# Altium PCB MGMEZZ04.PcbDoc (part 7 of 9)
Units mil, origin at the board's own origin, x right, y up, seen from the top; angles counter-clockwise.
Board outline 3790 x 5472.44 mil, 10 copper layers (TopLayer, InternalPlane1, MidLayer1, InternalPlane2, MidLayer2, MidLayer3, InternalPlane3, MidLayer4, InternalPlane4, BottomLayer), stack 57.08 mil thick; 846 components, 745 nets, 3323 pads, 1906 vias.
Unrouted connection lines stored in the file: 128.
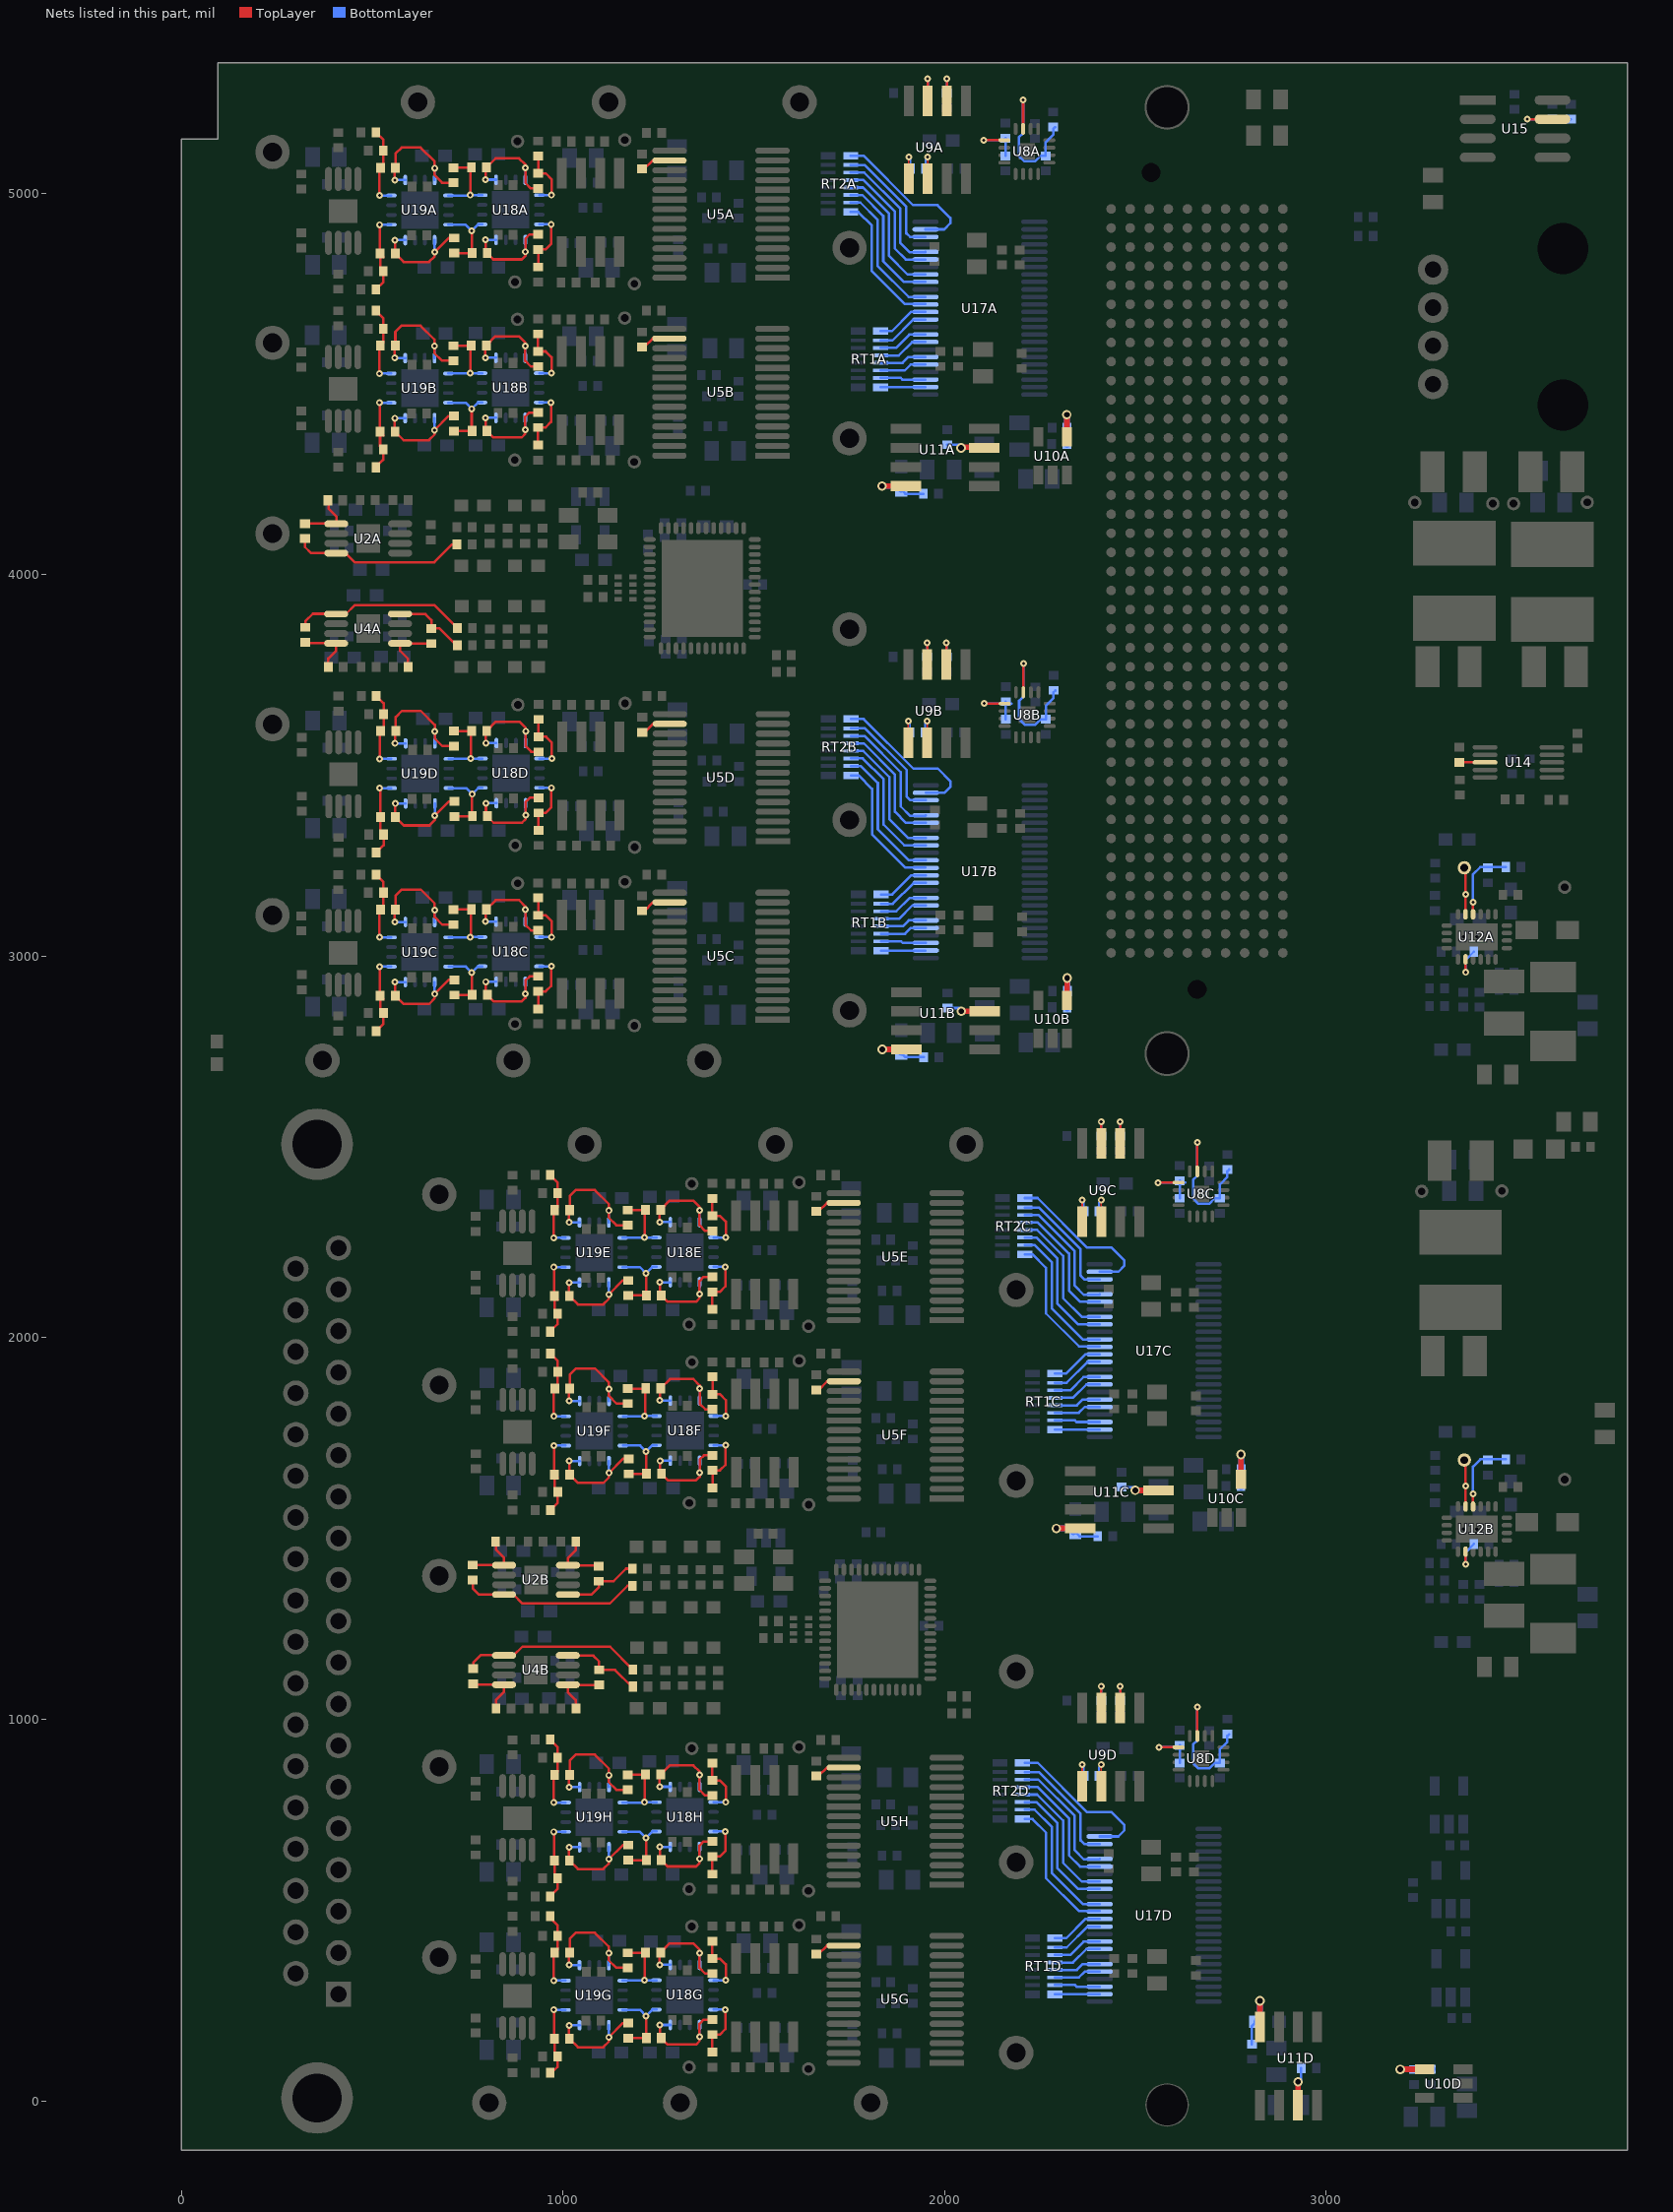
[diagram p15: the nets of this part, all layers, seen from the top]

## Via types
v1: diameter 18, hole 8, TopLayer to BottomLayer, 1296 vias
v2: diameter 18, hole 8, TopLayer to BottomLayer, tented both sides, 203 vias
v3: diameter 19.68, hole 7.87, TopLayer to BottomLayer, 188 vias
v4: diameter 25, hole 15, TopLayer to BottomLayer, tented both sides, 99 vias
v5: diameter 25, hole 15, TopLayer to BottomLayer, 72 vias
v6: diameter 35, hole 20, TopLayer to BottomLayer, 48 vias

## Nets (pads, with @x,y where several pads share a name; then routed paths per layer and width w, separated by ;. In a path a pad name is that pad's centre, name@x,y a point inside that pad or via, vN(x,y) a via of type N, cw(c..) or ccw(c..) an arc to the next point about the centre after c; other vN are vias at no path point) (continued)
NetR1B_1: R1B.1 R3B.2 U2B.8 | length 151.4
  TopLayer w6.5: U2B.8@1013.18,1403.29 R1B.1@1093.8,1403.29 ; U2B.8@1013.18,1403.85 1013.18,1422.78 1033.8,1443.4 R3B.2@1033.8,1466.12
NetR1B_2: R1B.2 R2B.1 U2B.5 | length 215.3
  TopLayer w6.5: U2B.5@1013.18,1326.51 1074.28,1326.51 1093.8,1346.03 R1B.2@1093.8,1362.03 ; R1B.2@1102.43,1362.03 R1B.2@1093.8,1362.03 ; R2B.1@1182.2,1394.84 1165.23,1394.84 1132.43,1362.03 R1B.2@1093.8,1362.03
NetR6A_2: R6A.2 R8A.1 U2A.1 | length 152.9
  TopLayer w6.5: R8A.1@324.11,4134.05 406.17,4134.05 406.17,4152.99 385.54,4173.61 R6A.2@385.54,4196.33
NetR6B_2: R6B.2 R8B.1 U2B.1 | length 152.9
  TopLayer w6.5: R8B.1@763.8,1404.4 845.86,1404.4 845.86,1423.34 825.23,1443.96 R6B.2@825.23,1466.68
NetR7A_1: R7A.1 R8A.2 U2A.4 | length 455.9
  TopLayer w6.5: R8A.2@324.11,4094.68 324.11,4072.49 339.32,4057.28 U2A.4@406.17,4057.28 ; U2A.4@406.17,4056.72 430.44,4056.72 454.11,4033.05 663.11,4033.05 709.54,4079.49 R7A.1@722.51,4079.49
NetR7B_1: R7B.1 R8B.2 U2B.4 | length 475.9
  TopLayer w6.5: R8B.2@763.8,1365.03 763.8,1342.84 779.01,1327.63 U2B.4@845.86,1327.63 ; U2B.4@845.86,1327.07 870.13,1327.07 893.8,1303.4 1092.8,1303.4 1122.8,1303.4 1169.23,1349.84 R7B.1@1182.2,1349.84
NetR9A_1: R9A.1 R11A.2 U4A.8 | length 151.4
  TopLayer w6.5: R9A.1@325.17,3820.94 U4A.8@405.79,3820.94 ; R11A.2@385.17,3758.1 385.17,3780.82 405.79,3801.44 U4A.8@405.79,3820.38
NetR9A_2: R9A.2 R10A.1 U4A.5 | length 456.6
  TopLayer w6.5: R9A.2@325.17,3862.19 325.17,3878.19 344.69,3897.71 U4A.5@405.79,3897.71 ; U4A.5@405.79,3897.15 431.21,3897.15 454.11,3920.05 663.94,3920.05 R10A.1@723.51,3860.49
NetR9B_1: R9B.1 R11B.2 U4B.8 | length 151.4
  TopLayer w6.5: R9B.1@764.86,1091.29 U4B.8@845.48,1091.29 ; R11B.2@824.86,1028.46 824.86,1051.17 845.48,1071.79 U4B.8@845.48,1090.73
NetR9B_2: R9B.2 R10B.1 U4B.5 | length 476.6
  TopLayer w6.5: R9B.2@764.86,1132.54 764.86,1148.54 784.38,1168.06 U4B.5@845.48,1168.06 ; U4B.5@845.48,1167.5 870.9,1167.5 893.8,1190.4 1093.63,1190.4 1123.63,1190.4 R10B.1@1183.2,1130.84
NetR14A_2: R14A.2 R16A.1 U4A.1 | length 152.9
  TopLayer w6.5: R14A.2@593.73,3757.54 593.73,3780.26 573.11,3800.88 573.11,3819.82 R16A.1@655.17,3819.82
NetR14B_2: R14B.2 R16B.1 U4B.1 | length 152.9
  TopLayer w6.5: R14B.2@1033.42,1027.9 1033.42,1050.61 1012.8,1071.24 1012.8,1090.17 R16B.1@1094.86,1090.17
NetR15A_1: R15A.1 R16A.2 U4A.4 | length 221.3
  TopLayer w6.5: U4A.4@548.84,3897.15 U4A.4@573.11,3897.15 ; U4A.4@573.11,3896.59 639.96,3896.59 655.17,3881.39 R16A.2@655.17,3859.19 676.6,3859.19 720.31,3815.49 R15A.1@723.51,3815.49
NetR15B_1: R15B.1 R16B.2 U4B.4 | length 241.3
  TopLayer w6.5: U4B.4@988.53,1167.5 U4B.4@1012.8,1167.5 ; U4B.4@1012.8,1166.94 1079.65,1166.94 1094.86,1151.74 R16B.2@1094.86,1129.54 1106.29,1129.54 1136.29,1129.54 1180,1085.84 R15B.1@1183.2,1085.84
NetR18A_1: R18A.1 R23A.1 R104A.2 U19A.8 | length 209.1
  TopLayer w6.5: R18A.1@510,5159 529.37,5139.63 R23A.1@529.37,5111.45 529.37,5074.65 519,5064.28 v1@519,4998.48 ; v1@518,4998.48 v1@522.24,4994.24
  BottomLayer w6.5: v1(519.24,4994.24) U19A.8@549.5,4994.24
NetR18B_1: R18B.1 R23B.1 R104B.2 U19B.8 | length 209.1
  TopLayer w6.5: R18B.1@509.75,4692.34 529.12,4672.97 R23B.1@529.12,4644.79 529.12,4607.99 518.75,4597.62 v1@518.75,4531.82 ; v1@517.75,4531.82 v1@522,4527.58
  BottomLayer w6.5: v1(519,4527.58) U19B.8@549.26,4527.58
NetR18C_1: R18C.1 R23C.1 R104C.2 U19C.8 | length 209.1
  TopLayer w6.5: R18C.1@510.2,3214.37 529.57,3195 R23C.1@529.57,3166.82 529.57,3130.02 519.2,3119.65 v1@519.2,3053.85 ; v1@518.2,3053.85 v1@522.44,3049.61
  BottomLayer w6.5: v1(519.44,3049.61) U19C.8@549.7,3049.61
NetR18D_1: R18D.1 R23D.1 R104D.2 U19D.8 | length 209.1
  TopLayer w6.5: R18D.1@510.81,3682.34 530.18,3662.97 R23D.1@530.18,3634.79 530.18,3597.99 519.81,3587.62 v1@519.81,3521.82 ; v1@518.81,3521.82 v1@523.06,3517.58
  BottomLayer w6.5: v1(520.06,3517.58) U19D.8@550.32,3517.58
NetR18E_1: R18E.1 R23E.1 R104E.2 U19E.8 | length 209.1
  TopLayer w6.5: R18E.1@966.5,2426.69 985.87,2407.32 R23E.1@985.87,2379.14 985.87,2342.34 975.5,2331.97 v1@975.5,2266.17 ; v1@974.5,2266.17 v1@978.75,2261.93
  BottomLayer w6.5: v1(975.75,2261.93) U19E.8@1006.01,2261.93
NetR18F_1: R18F.1 R23F.1 R104F.2 U19F.8 | length 209.1
  TopLayer w6.5: R18F.1@966.89,1958.98 986.26,1939.61 R23F.1@986.26,1911.43 986.26,1874.63 975.89,1864.26 v1@975.89,1798.46 ; v1@974.89,1798.46 v1@979.13,1794.22
  BottomLayer w6.5: v1(976.13,1794.22) U19F.8@1006.39,1794.22
NetR18G_1: R18G.1 R23G.1 R104G.2 U19G.8 | length 209.1
  TopLayer w6.5: R18G.1@966.5,479.98 985.87,460.61 R23G.1@985.87,432.43 985.87,395.63 975.5,385.26 v1@975.5,319.46 ; v1@974.5,319.46 v1@978.75,315.22
  BottomLayer w6.5: v1(975.75,315.22) U19G.8@1006.01,315.22
NetR18H_1: R18H.1 R23H.1 R104H.2 U19H.8 | length 209.1
  TopLayer w6.5: R18H.1@966.5,946.69 985.87,927.32 R23H.1@985.87,899.14 985.87,862.34 975.5,851.97 v1@975.5,786.17 ; v1@974.5,786.17 v1@978.75,781.93
  BottomLayer w6.5: v1(975.75,781.93) U19H.8@1006.01,781.93
NetR20A_2: R20A.2 U5A.16 | length 81.2
  TopLayer w6.5: R20A.2@1207.11,5063.65 1213.11,5063.65 1235.31,5085.85 U5A.16@1279.11,5085.85
NetR20B_2: R20B.2 U5B.16 | length 81.2
  TopLayer w6.5: R20B.2@1206.86,4596.99 1212.86,4596.99 1235.06,4619.19 U5B.16@1278.86,4619.19
NetR20C_2: R20C.2 U5C.16 | length 81.2
  TopLayer w6.5: R20C.2@1207.31,3119.02 1213.31,3119.02 1235.51,3141.22 U5C.16@1279.31,3141.22
NetR20D_2: R20D.2 U5D.16 | length 81.2
  TopLayer w6.5: R20D.2@1207.92,3586.99 1213.92,3586.99 1236.12,3609.19 U5D.16@1279.92,3609.19
NetR20E_2: R20E.2 U5E.16 | length 81.2
  TopLayer w6.5: R20E.2@1663.61,2331.34 1669.61,2331.34 1691.81,2353.54 U5E.16@1735.61,2353.54
NetR20F_2: R20F.2 U5F.16 | length 81.2
  TopLayer w6.5: R20F.2@1664,1863.63 1670,1863.63 1692.2,1885.83 U5F.16@1736,1885.83
NetR20G_2: R20G.2 U5G.16 | length 81.2
  TopLayer w6.5: R20G.2@1663.61,384.63 1669.61,384.63 1691.81,406.83 U5G.16@1735.61,406.83
NetR20H_2: R20H.2 U5H.16 | length 81.2
  TopLayer w6.5: R20H.2@1663.61,851.34 1669.61,851.34 1691.81,873.54 U5H.16@1735.61,873.54
NetR21_2: R21.2 R25.1 U15.7 | length 176.9
  TopLayer w6.5: v1@3530.03,5194 U15.7@3593,5194
  BottomLayer w6.5: v1(3527.03,5194) R21.2@3593,5194 R25.1@3641,5194
NetR26A_1: R26A.1 R35A.1 R103A.1 U19A.5 | length 223.8
  TopLayer w6.5: R35A.1@510,4748.3 529.37,4767.67 R26A.1@529.37,4795.85 521.11,4804.11 R103A.1@521.11,4841.65 523.24,4843.78 520.24,4846.78 v1@520.24,4917.47 ; R103A.1@521.74,4840.28 R103A.1@529.37,4832.65
  BottomLayer w6.5: v1(519.24,4917.47) U19A.5@549.5,4917.47
NetR26B_1: R26B.1 R35B.1 R103B.1 U19B.5 | length 223.8
  TopLayer w6.5: R35B.1@509.75,4281.63 529.12,4301 R26B.1@529.12,4329.19 520.86,4337.45 R103B.1@520.86,4374.99 523,4377.12 520,4380.12 v1@520,4450.81 ; R103B.1@521.49,4373.62 R103B.1@529.12,4365.99
  BottomLayer w6.5: v1(519,4450.81) U19B.5@549.26,4450.81
NetR26C_1: R26C.1 R35C.1 R103C.1 U19C.5 | length 223.8
  TopLayer w6.5: R35C.1@510.2,2803.67 529.57,2823.04 R26C.1@529.57,2851.22 521.31,2859.48 R103C.1@521.31,2897.02 523.44,2899.15 520.44,2902.15 v1@520.44,2972.84 ; R103C.1@521.94,2895.65 R103C.1@529.57,2888.02
  BottomLayer w6.5: v1(519.44,2972.84) U19C.5@549.7,2972.84
NetR26D_1: R26D.1 R35D.1 R103D.1 U19D.5 | length 223.8
  TopLayer w6.5: R35D.1@510.81,3271.63 530.18,3291 R26D.1@530.18,3319.19 521.92,3327.45 R103D.1@521.92,3364.99 524.06,3367.12 521.06,3370.12 v1@521.06,3440.81 ; R103D.1@522.55,3363.62 R103D.1@530.18,3355.99
  BottomLayer w6.5: v1(520.06,3440.81) U19D.5@550.32,3440.81
NetR26E_1: R26E.1 R35E.1 R103E.1 U19E.5 | length 223.8
  TopLayer w6.5: R35E.1@966.5,2015.99 985.87,2035.36 R26E.1@985.87,2063.54 977.61,2071.8 R103E.1@977.61,2109.34 979.75,2111.47 976.75,2114.47 v1@976.75,2185.16 ; R103E.1@978.24,2107.97 R103E.1@985.87,2100.34
  BottomLayer w6.5: v1(975.75,2185.16) U19E.5@1006.01,2185.16
NetR26F_1: R26F.1 R35F.1 R103F.1 U19F.5 | length 223.8
  TopLayer w6.5: R35F.1@966.89,1548.28 986.26,1567.65 R26F.1@986.26,1595.83 978,1604.09 R103F.1@978,1641.63 980.13,1643.76 977.13,1646.76 v1@977.13,1717.45 ; R103F.1@978.63,1640.26 R103F.1@986.26,1632.63
  BottomLayer w6.5: v1(976.13,1717.45) U19F.5@1006.39,1717.45
NetR26G_1: R26G.1 R35G.1 R103G.1 U19G.5 | length 223.8
  TopLayer w6.5: R35G.1@966.5,69.28 985.87,88.65 R26G.1@985.87,116.83 977.61,125.09 R103G.1@977.61,162.63 979.75,164.76 976.75,167.76 v1@976.75,238.45 ; R103G.1@978.24,161.26 R103G.1@985.87,153.63
  BottomLayer w6.5: v1(975.75,238.45) U19G.5@1006.01,238.45
NetR26H_1: R26H.1 R35H.1 R103H.1 U19H.5 | length 223.8
  TopLayer w6.5: R35H.1@966.5,535.99 985.87,555.36 R26H.1@985.87,583.54 977.61,591.8 R103H.1@977.61,629.34 979.75,631.47 976.75,634.47 v1@976.75,705.16 ; R103H.1@978.24,627.97 R103H.1@985.87,620.34
  BottomLayer w6.5: v1(975.75,705.16) U19H.5@1006.01,705.16
NetR27A_1: R27A.1 R28A.2 U10A.4 | length 138.5
  TopLayer w15: U10A.4@2320.28,4361.42 v5(2320.28,4419.66)
  BottomLayer w15: v5(2320.28,4419.66) 2321.02,4418.92 R27A.1@2321.02,4385.43 2321.02,4340.63 R28A.2@2320.37,4339.99
NetR27B_1: R27B.1 R28B.2 U10B.4 | length 138.5
  TopLayer w15: U10B.4@2321.09,2884.76 v5(2321.09,2942.99)
  BottomLayer w15: v5(2321.09,2942.99) 2321.83,2942.25 R27B.1@2321.83,2908.77 2321.83,2863.97 R28B.2@2321.18,2863.32
NetR27C_1: R27C.1 R28C.2 U10C.4 | length 145.5
  TopLayer w15: U10C.4@2776.78,1629.11 v5(2776.78,1694.35)
  BottomLayer w15: v5@2776.78,1687.35 2777.52,1686.61 2777.52,1608.32 R28C.2@2776.87,1607.68
NetR27D_1: R27D.1 R28D.2 U10D.4 | length 147.2
  TopLayer w15: v5@3197.16,82.47 U10D.4@3258.39,82.47
  BottomLayer w15: v5@3194.16,83.21 3279.18,83.21 R28D.2@3279.83,82.56
  other v5: 3194.16,82.47
NetR37A_2: R37A.2 R38A.1 U8A.15 | length 374.9
  TopLayer w6.5: U8A.15@2205.8,5168.63 2205.8,5234.5
  BottomLayer w6.5: 2205.8,5234.5 2205.8,5157.43 2194.65,5146.28 2194.65,5097.95 2209.02,5083.58 2236.92,5083.58 2251.29,5097.95 R38A.1@2264.65,5097.95 2264.65,5133.58 2284.65,5153.58 2284.65,5168.58 R37A.2@2289.65,5173.58
  other v1: 2205.8,5244.5
NetR37B_2: R37B.2 R38B.1 U8B.15 | length 374.9
  TopLayer w6.5: U8B.15@2206.61,3691.97 2206.61,3757.84
  BottomLayer w6.5: 2206.61,3757.84 2206.61,3680.77 2195.46,3669.62 2195.46,3621.29 2209.83,3606.92 2237.74,3606.92 2252.11,3621.29 R38B.1@2265.46,3621.29 2265.46,3656.92 2285.46,3676.92 2285.46,3691.92 R37B.2@2290.46,3696.92
  other v1: 2206.61,3767.84
NetR37C_2: R37C.2 R38C.1 U8C.15 | length 374.9
  TopLayer w6.5: U8C.15@2662.3,2436.32 2662.3,2502.2
  BottomLayer w6.5: 2662.3,2502.2 2662.3,2425.12 2651.15,2413.97 2651.15,2365.64 2665.52,2351.27 2693.43,2351.27 2707.8,2365.64 R38C.1@2721.15,2365.64 2721.15,2401.27 2741.15,2421.27 2741.15,2436.27 R37C.2@2746.15,2441.27
  other v1: 2662.3,2512.2
NetR37D_2: R37D.2 R38D.1 U8D.15 | length 374.9
  TopLayer w6.5: U8D.15@2662.3,956.32 2662.3,1022.2
  BottomLayer w6.5: 2662.3,1022.2 2662.3,945.12 2651.15,933.97 2651.15,885.64 2665.52,871.27 2693.43,871.27 2707.8,885.64 R38D.1@2721.15,885.64 2721.15,921.27 2741.15,941.27 2741.15,956.27 R37D.2@2746.15,961.27
  other v1: 2662.3,1032.2
NetR39A_2: R39A.2 R40A.2 U11A.4 | length 180.4
  TopLayer w15: v5@1831,4232.62 U11A.4@1899.38,4232.62
  BottomLayer w6.5: R39A.2@1886,4223 1897,4212 R40A.2@1944.63,4212
  BottomLayer w15: v5(1836.14,4232.62) R39A.2@1871.38,4232.62 ; R39A.2@1876.38,4232.62 R39A.2@1886,4223
NetR39B_2: R39B.2 R40B.2 U11B.4 | length 175.3
  TopLayer w15: v5(1836.96,2755.95) U11B.4@1900.19,2755.95
  BottomLayer w6.5: R39B.2@1886.81,2746.34 1897.81,2735.34 R40B.2@1945.44,2735.34
  BottomLayer w15: v5(1836.96,2755.95) R39B.2@1872.2,2755.95 ; R39B.2@1877.2,2755.95 R39B.2@1886.81,2746.34
NetR39C_2: R39C.2 R40C.2 U11C.4 | length 170.3
  TopLayer w15: v5(2292.65,1500.31) U11C.4@2350.88,1500.31
  BottomLayer w6.5: R39C.2@2342.5,1490.69 2353.5,1479.69 R40C.2@2401.13,1479.69
  BottomLayer w15: v5(2292.65,1500.31) 2327.89,1500.31 R39C.2@2337.5,1490.69
NetR39D_2: R39D.2 R40D.2 U11D.4 | length 190.3
  TopLayer w15: U11D.4@2826.14,193.69 v5(2826.14,261.93)
  BottomLayer w6.5: R40D.2@2805.53,148.44 2805.53,196.07 R39D.2@2816.53,207.07
  BottomLayer w15: R39D.2@2816.53,207.07 2826.14,216.69 v5(2826.14,261.93)
NetR41A_2: R41A.2 R42A.1 U8A.1 | length 160.4
  TopLayer w6.5: v1(2102.71,5139.1) U8A.1@2156.58,5139.1
  BottomLayer w6.5: v1@2102.71,5136.1 2106.61,5140 2155.43,5140 R41A.2@2159.65,5144.21 R42A.1@2159.65,5097.95
NetR41B_2: R41B.2 R42B.1 U8B.1 | length 172.1
  TopLayer w6.5: v1(2103.52,3662.44) U8B.1@2157.4,3662.44
  BottomLayer w6.5: v1(2103.52,3662.44) 2175.46,3662.44 ; R42B.1@2160.46,3621.29 R41B.2@2160.46,3667.55
NetR41C_2: R41C.2 R42C.1 U8C.1 | length 172.1
  TopLayer w6.5: v1(2559.21,2406.79) U8C.1@2613.09,2406.79
  BottomLayer w6.5: v1(2559.21,2406.79) 2631.15,2406.79 ; R42C.1@2616.15,2365.64 R41C.2@2616.15,2411.9
NetR41D_2: R41D.2 R42D.1 U8D.1 | length 151.1
  TopLayer w6.5: v1(2562.21,926.79) U8D.1@2613.09,926.79
  BottomLayer w6.5: v1(2562.21,926.79) R41D.2@2616.15,926.79 ; R42D.1@2616.15,885.64 R41D.2@2616.15,931.9
NetR43A_1: R43A.1 U9A.7 | length 94.1
  TopLayer w6.5: U9A.7@1956.01,5242.6 v1(1956.01,5299.66)
  BottomLayer w6.5: R43A.1@1956.01,5262.6 v1(1956.01,5299.66)
NetR43B_1: R43B.1 U9B.7 | length 94.1
  TopLayer w6.5: U9B.7@1954.71,3764.89 v1(1954.71,3821.95)
  BottomLayer w6.5: R43B.1@1954.71,3784.89 v1(1954.71,3821.95)
NetR43C_1: R43C.1 U9C.7 | length 94.1
  TopLayer w6.5: U9C.7@2410.4,2509.24 v1(2410.4,2566.31)
  BottomLayer w6.5: R43C.1@2410.4,2529.24 v1(2410.4,2566.31)
NetR43D_1: R43D.1 U9D.7 | length 94.1
  TopLayer w6.5: U9D.7@2410.4,1029.24 v1(2410.4,1086.31)
  BottomLayer w6.5: R43D.1@2410.4,1049.24 v1(2410.4,1086.31)
NetR45A_1: R45A.1 U9A.6 | length 95.5
  TopLayer w6.5: U9A.6@2006.01,5242.6 v1(2006,5299.66)
  TopLayer w15: U9A.6@2006.01,5242.6 U9A.6@2007,5243.59
  BottomLayer w6.5: R45A.1@2006,5262.6 v1(2006,5299.66)
NetR45B_1: R45B.1 U9B.6 | length 95.5
  TopLayer w6.5: U9B.6@2004.71,3764.89 v1(2004.7,3821.95)
  TopLayer w15: U9B.6@2004.71,3764.89 U9B.6@2005.7,3765.88
  BottomLayer w6.5: R45B.1@2004.7,3784.89 v1(2004.7,3821.95)
NetR45C_1: R45C.1 U9C.6 | length 94.1
  TopLayer w6.5: U9C.6@2460.4,2509.24 v1(2460.39,2566.31)
  BottomLayer w6.5: R45C.1@2460.39,2529.24 v1(2460.39,2566.31)
NetR45D_1: R45D.1 U9D.6 | length 94.1
  TopLayer w6.5: U9D.6@2460.39,1029.25 v1(2460.39,1086.31)
  BottomLayer w6.5: R45D.1@2460.39,1049.24 v1(2460.39,1086.31)
NetR47A_1: R47A.1 U11A.7 | length 103.9
  TopLayer w15: v5@2043.14,4334.62 U11A.7@2104.38,4334.62
  BottomLayer w6.5: R47A.1@2007,4341 v5@2037.76,4341 ; v5@2034.76,4341 v5(2043.14,4332.62)
NetR47B_1: R47B.1 U11B.7 | length 103.9
  TopLayer w15: v5(2043.96,2855.95) U11B.7@2105.19,2855.95
  BottomLayer w6.5: R47B.1@2007.81,2864.34 v5@2038.57,2864.34 ; v5@2035.57,2864.34 v5(2043.96,2855.95)
NetR47C_1: R47C.1 U11C.7 | length 103.9
  TopLayer w15: v5(2499.65,1600.31) U11C.7@2560.88,1600.31
  BottomLayer w6.5: R47C.1@2463.5,1608.69 v5@2494.26,1608.69 ; v5@2491.26,1608.69 v5(2499.65,1600.31)
NetR47D_1: R47D.1 U11D.7 | length 103.9
  TopLayer w15: U11D.7@2926.14,-11.31 v5(2926.14,49.93)
  BottomLayer w6.5: v5(2926.14,49.93) v5@2934.53,58.31 ; v5@2934.53,55.31 R47D.1@2934.53,86.07
NetR52_2: R52.2 U14.8 | length 67.4
  TopLayer w6.5: R52.2@3348.98,3508.34 3349.08,3508.24 U14.8@3416.39,3508.24
NetR53A_2: R53A.2 R59A.1 U12A.4 | length 198.3
  TopLayer w6.5: U12A.4@3384.94,3110.12 v1(3384.94,3142.14)
  BottomLayer w6.5: v1(3384.94,3142.14) 3384.94,3214.75 3404.2,3234.01 R59A.1@3470.62,3234.01
NetR53B_2: R53B.2 R59B.1 U12B.4 | length 198.3
  TopLayer w6.5: U12B.4@3384.94,1557.74 v1@3384.94,1587.76
  BottomLayer w6.5: v1@3384.94,1587.76 3384.94,1662.37 3404.2,1681.63 R59B.1@3470.62,1681.63
  other v1: 3384.94,1590.76
NetR57A_1: R57A.1 U12A.12 | length 97
  TopLayer w6.5: v1(3365.25,2957.99) U12A.12@3365.25,2992.01
  BottomLayer w6.5: v1(3365.25,2957.99) 3365.25,2990.27 R57A.1@3386.99,3012.01
NetR57B_1: R57B.1 U12B.12 | length 95
  TopLayer w6.5: v1(3365.25,1406.61) U12B.12@3365.25,1439.63
  BottomLayer w6.5: v1(3365.25,1406.61) 3365.25,1437.89 R57B.1@3386.99,1459.63
NetR95A_1: R95A.1 R97A.1 U18A.16 | length 197.1
  TopLayer w6.5: R97A.1@927.11,4850.65 935.11,4858.65 935.11,4812.65 R95A.1@929.11,4806.65 ; R97A.1@929.11,4852.65 954.65,4852.65 969,4867 v1@969,4918.26
  BottomLayer w6.5: U18A.16@937.91,4918.26 v1(969.17,4918.26) v1@972.08,4918.26
NetR95B_1: R95B.1 R97B.1 U18B.16 | length 197.1
  TopLayer w6.5: R97B.1@926.86,4383.99 934.86,4391.99 934.86,4345.99 R95B.1@928.86,4339.99 ; R97B.1@928.86,4385.99 954.4,4385.99 968.75,4400.34 v1@968.75,4451.6
  BottomLayer w6.5: U18B.16@937.67,4451.6 v1(968.93,4451.6) v1@971.84,4451.6
NetR95C_1: R95C.1 R97C.1 U18C.16 | length 197.1
  TopLayer w6.5: R97C.1@927.31,2906.02 935.31,2914.02 935.31,2868.02 R95C.1@929.31,2862.02 ; R97C.1@929.31,2908.02 954.85,2908.02 969.2,2922.37 v1@969.2,2973.63
  BottomLayer w6.5: U18C.16@938.11,2973.63 v1(969.37,2973.63) v1@972.28,2973.63
NetR95D_1: R95D.1 R97D.1 U18D.16 | length 197.1
  TopLayer w6.5: R97D.1@927.92,3373.99 935.92,3381.99 935.92,3335.99 R95D.1@929.92,3329.99 ; R97D.1@929.92,3375.99 955.46,3375.99 969.81,3390.34 v1@969.81,3441.6
  BottomLayer w6.5: U18D.16@938.73,3441.6 v1(969.99,3441.6) v1@972.9,3441.6
NetR95E_1: R95E.1 R97E.1 U18E.16 | length 197.1
  TopLayer w6.5: R97E.1@1383.61,2118.34 1391.61,2126.34 1391.61,2080.34 R95E.1@1385.61,2074.34 ; R97E.1@1385.61,2120.34 1411.15,2120.34 1425.5,2134.69 v1@1425.5,2185.95
  BottomLayer w6.5: U18E.16@1394.42,2185.95 v1(1425.68,2185.95) v1@1428.59,2185.95
NetR95F_1: R95F.1 R97F.1 U18F.16 | length 197.1
  TopLayer w6.5: R97F.1@1384,1650.63 1392,1658.63 1392,1612.63 R95F.1@1386,1606.63 ; R97F.1@1386,1652.63 1411.54,1652.63 1425.89,1666.98 v1@1425.89,1718.24
  BottomLayer w6.5: U18F.16@1394.8,1718.24 v1(1426.06,1718.24) v1@1428.97,1718.24
NetR95G_1: R95G.1 R97G.1 U18G.16 | length 197.1
  TopLayer w6.5: R97G.1@1383.61,171.63 1391.61,179.63 1391.61,133.63 R95G.1@1385.61,127.63 ; R97G.1@1385.61,173.63 1411.15,173.63 1425.5,187.98 v1@1425.5,239.24
  BottomLayer w6.5: U18G.16@1394.42,239.24 v1(1425.68,239.24) v1@1428.59,239.24
NetR95H_1: R95H.1 R97H.1 U18H.16 | length 197.1
  TopLayer w6.5: R97H.1@1383.61,638.34 1391.61,646.34 1391.61,600.34 R95H.1@1385.61,594.34 ; R97H.1@1385.61,640.34 1411.15,640.34 1425.5,654.69 v1@1425.5,705.95
  BottomLayer w6.5: U18H.16@1394.42,705.95 v1(1425.68,705.95) v1@1428.59,705.95
NetR96A_1: R96A.1 R98A.2 U18A.13 | length 156
  TopLayer w6.5: R96A.1@935.11,5097.65 R98A.2@935.11,5052.02 954.98,5052.02 970.17,5036.83 v1(970.17,4995.03)
  BottomLayer w6.5: U18A.13@937.91,4995.03 v1@965.17,4995.03
NetR96B_1: R96B.1 R98B.2 U18B.13 | length 156
  TopLayer w6.5: R96B.1@934.86,4630.99 R98B.2@934.86,4585.36 954.74,4585.36 969.93,4570.17 v1(969.93,4528.37)
  BottomLayer w6.5: U18B.13@937.67,4528.37 v1@964.93,4528.37
NetR96C_1: R96C.1 R98C.2 U18C.13 | length 156
  TopLayer w6.5: R96C.1@935.31,3153.02 R98C.2@935.31,3107.39 955.18,3107.39 970.37,3092.2 v1(970.37,3050.4)
  BottomLayer w6.5: U18C.13@938.11,3050.4 v1@965.37,3050.4
NetR96D_1: R96D.1 R98D.2 U18D.13 | length 156
  TopLayer w6.5: R96D.1@935.92,3620.99 R98D.2@935.92,3575.36 955.8,3575.36 970.99,3560.17 v1(970.99,3518.37)
  BottomLayer w6.5: U18D.13@938.73,3518.37 v1@965.99,3518.37
NetR96E_1: R96E.1 R98E.2 U18E.13 | length 156
  TopLayer w6.5: R96E.1@1391.61,2365.34 R98E.2@1391.61,2319.71 1411.49,2319.71 1426.68,2304.52 v1(1426.68,2262.72)
  BottomLayer w6.5: U18E.13@1394.42,2262.72 v1@1421.68,2262.72
NetR96F_1: R96F.1 R98F.2 U18F.13 | length 156
  TopLayer w6.5: R96F.1@1392,1897.63 R98F.2@1392,1852 1411.87,1852 1427.06,1836.81 v1(1427.06,1795.02)
  BottomLayer w6.5: U18F.13@1394.8,1795.02 v1@1422.06,1795.02
NetR96G_1: R96G.1 R98G.2 U18G.13 | length 156
  TopLayer w6.5: R96G.1@1391.61,418.63 R98G.2@1391.61,373 1411.49,373 1426.68,357.81 v1(1426.68,316.02)
  BottomLayer w6.5: U18G.13@1394.42,316.02 v1@1421.68,316.02
NetR96H_1: R96H.1 R98H.2 U18H.13 | length 156
  TopLayer w6.5: R96H.1@1391.61,885.34 R98H.2@1391.61,839.71 1411.49,839.71 1426.68,824.52 v1(1426.68,782.72)
  BottomLayer w6.5: U18H.13@1394.42,782.72 v1@1421.68,782.72
NetR97A_2: R97A.2 R99A.2 U18A.1 U18A.4 | length 289.6
  TopLayer w6.5: v1(797.46,4877.91) 797.46,4847.66 R99A.2@801.48,4843.65 ; R99A.2@800.48,4843.65 817.48,4826.65 892.11,4826.65 901.5,4836.03 v1(901.5,4846.65) 901.5,4881.03 912.48,4892.02 R97A.2@935.11,4892.02
  BottomLayer w6.5: v1(797.46,4877.91) U18A.4@824.72,4877.91 ; v1(901.5,4846.65) U18A.1@901.5,4877.91
NetR97B_2: R97B.2 R99B.2 U18B.1 U18B.4 | length 289.6
  TopLayer w6.5: v1(797.22,4411.25) 797.22,4381 R99B.2@801.23,4376.99 ; R99B.2@800.23,4376.99 817.23,4359.99 891.86,4359.99 901.25,4369.37 v1(901.25,4379.99) 901.25,4414.37 912.23,4425.36 R97B.2@934.86,4425.36
  BottomLayer w6.5: v1(797.22,4411.25) U18B.4@824.48,4411.25 ; v1(901.25,4379.99) U18B.1@901.25,4411.25
NetR97C_2: R97C.2 R99C.2 U18C.1 U18C.4 | length 289.6
  TopLayer w6.5: v1(797.66,2933.28) 797.66,2903.03 R99C.2@801.68,2899.02 ; R99C.2@800.68,2899.02 817.68,2882.02 892.31,2882.02 901.7,2891.4 v1(901.7,2902.02) 901.7,2936.4 912.68,2947.39 R97C.2@935.31,2947.39
  BottomLayer w6.5: v1(797.66,2933.28) U18C.4@824.92,2933.28 ; v1(901.7,2902.02) U18C.1@901.7,2933.28
NetR97D_2: R97D.2 R99D.2 U18D.1 U18D.4 | length 289.6
  TopLayer w6.5: v1(798.28,3401.25) 798.28,3371 R99D.2@802.29,3366.99 ; R99D.2@801.29,3366.99 818.29,3349.99 892.92,3349.99 902.31,3359.37 v1(902.31,3369.99) 902.31,3404.37 913.29,3415.36 R97D.2@935.92,3415.36
  BottomLayer w6.5: v1(798.28,3401.25) U18D.4@825.54,3401.25 ; v1(902.31,3369.99) U18D.1@902.31,3401.25
NetR97E_2: R97E.2 R99E.2 U18E.1 U18E.4 | length 289.6
  TopLayer w6.5: v1(1253.97,2145.6) 1253.97,2115.35 R99E.2@1257.98,2111.34 ; R99E.2@1256.98,2111.34 1273.98,2094.34 1348.61,2094.34 1358,2103.72 v1(1358,2114.34) 1358,2148.72 1368.98,2159.71 R97E.2@1391.61,2159.71
  BottomLayer w6.5: v1(1253.97,2145.6) U18E.4@1281.23,2145.6 ; v1(1358,2114.34) U18E.1@1358,2145.6
NetR97F_2: R97F.2 R99F.2 U18F.1 U18F.4 | length 289.6
  TopLayer w6.5: v1(1254.35,1677.89) 1254.35,1647.65 R99F.2@1258.37,1643.63 ; R99F.2@1257.37,1643.63 1274.37,1626.63 1349,1626.63 1358.39,1636.02 v1(1358.39,1646.63) 1358.39,1681.02 1369.37,1692 R97F.2@1392,1692
  BottomLayer w6.5: v1(1254.35,1677.89) U18F.4@1281.61,1677.89 ; v1(1358.39,1646.63) U18F.1@1358.39,1677.89
NetR97G_2: R97G.2 R99G.2 U18G.1 U18G.4 | length 289.6
  TopLayer w6.5: v1(1253.97,198.89) 1253.97,168.65 R99G.2@1257.98,164.63 ; R99G.2@1256.98,164.63 1273.98,147.63 1348.61,147.63 1358,157.02 v1(1358,167.63) 1358,202.02 1368.98,213 R97G.2@1391.61,213
  BottomLayer w6.5: v1(1253.97,198.89) U18G.4@1281.23,198.89 ; v1(1358,167.63) U18G.1@1358,198.89
NetR97H_2: R97H.2 R99H.2 U18H.1 U18H.4 | length 289.6
  TopLayer w6.5: v1(1253.97,665.6) 1253.97,635.35 R99H.2@1257.98,631.34 ; R99H.2@1256.98,631.34 1273.98,614.34 1348.61,614.34 1358,623.72 v1(1358,634.34) 1358,668.72 1368.98,679.71 R97H.2@1391.61,679.71
  BottomLayer w6.5: v1(1253.97,665.6) U18H.4@1281.23,665.6 ; v1(1358,634.34) U18H.1@1358,665.6
NetR98A_1: R98A.1 R100A.2 U18A.9 U18A.12 | length 303.7
  TopLayer w6.5: v1(797.11,5035.65) 797.11,5065.28 R100A.2@799.48,5067.65 823.48,5091.65 885.11,5091.65 901.5,5075.26 v1(901.5,5066.65) 901.5,5027.26 916.11,5012.65 R98A.1@935.11,5012.65
  BottomLayer w6.5: v1@794.2,5035.65 v1(797.11,5035.65) U18A.9@824.37,5035.65 ; U18A.12@901.5,5035.39 v1(901.5,5066.65) v1@901.5,5069.56
NetR98B_1: R98B.1 R100B.2 U18B.9 U18B.12 | length 303.7
  TopLayer w6.5: v1(796.86,4568.99) 796.86,4598.62 R100B.2@799.23,4600.99 823.23,4624.99 884.86,4624.99 901.25,4608.6 v1(901.25,4599.99) 901.25,4560.6 915.86,4545.99 R98B.1@934.86,4545.99
  BottomLayer w6.5: v1@793.95,4568.99 v1(796.86,4568.99) U18B.9@824.12,4568.99 ; U18B.12@901.25,4568.73 v1(901.25,4599.99) v1@901.25,4602.9
NetR98C_1: R98C.1 R100C.2 U18C.9 U18C.12 | length 303.7
  TopLayer w6.5: v1(797.31,3091.02) 797.31,3120.65 R100C.2@799.68,3123.02 823.68,3147.02 885.31,3147.02 901.7,3130.63 v1(901.7,3122.02) 901.7,3082.63 916.31,3068.02 R98C.1@935.31,3068.02
  BottomLayer w6.5: v1@794.4,3091.02 v1(797.31,3091.02) U18C.9@824.57,3091.02 ; U18C.12@901.7,3090.76 v1(901.7,3122.02) v1@901.7,3124.93
NetR98D_1: R98D.1 R100D.2 U18D.9 U18D.12 | length 303.7
  TopLayer w6.5: v1(797.92,3558.99) 797.92,3588.62 R100D.2@800.29,3590.99 824.29,3614.99 885.92,3614.99 902.31,3598.6 v1(902.31,3589.99) 902.31,3550.6 916.92,3535.99 R98D.1@935.92,3535.99
  BottomLayer w6.5: v1@795.01,3558.99 v1(797.92,3558.99) U18D.9@825.18,3558.99 ; U18D.12@902.31,3558.73 v1(902.31,3589.99) v1@902.31,3592.9
NetR98E_1: R98E.1 R100E.2 U18E.9 U18E.12 | length 303.7
  TopLayer w6.5: v1(1253.61,2303.34) 1253.61,2332.97 R100E.2@1255.98,2335.34 1279.98,2359.34 1341.61,2359.34 1358,2342.95 v1(1358,2334.34) 1358,2294.95 1372.61,2280.34 R98E.1@1391.61,2280.34
  BottomLayer w6.5: v1@1250.7,2303.34 v1(1253.61,2303.34) U18E.9@1280.87,2303.34 ; U18E.12@1358,2303.08 v1(1358,2334.34) v1@1358,2337.25
NetR98F_1: R98F.1 R100F.2 U18F.9 U18F.12 | length 303.7
  TopLayer w6.5: v1(1254,1835.63) 1254,1865.26 R100F.2@1256.37,1867.63 1280.37,1891.63 1342,1891.63 1358.39,1875.24 v1(1358.39,1866.63) 1358.39,1827.24 1373,1812.63 R98F.1@1392,1812.63
  BottomLayer w6.5: v1@1251.09,1835.63 v1(1254,1835.63) U18F.9@1281.26,1835.63 ; U18F.12@1358.39,1835.37 v1(1358.39,1866.63) v1@1358.39,1869.54
NetR98G_1: R98G.1 R100G.2 U18G.9 U18G.12 | length 303.7
  TopLayer w6.5: v1(1253.61,356.63) 1253.61,386.26 R100G.2@1255.98,388.63 1279.98,412.63 1341.61,412.63 1358,396.24 v1(1358,387.63) 1358,348.24 1372.61,333.63 R98G.1@1391.61,333.63
  BottomLayer w6.5: v1@1250.7,356.63 v1(1253.61,356.63) U18G.9@1280.87,356.63 ; U18G.12@1358,356.37 v1(1358,387.63) v1@1358,390.54
NetR98H_1: R98H.1 R100H.2 U18H.9 U18H.12 | length 303.7
  TopLayer w6.5: v1(1253.61,823.34) 1253.61,852.97 R100H.2@1255.98,855.34 1279.98,879.34 1341.61,879.34 1358,862.95 v1(1358,854.34) 1358,814.95 1372.61,800.34 R98H.1@1391.61,800.34
  BottomLayer w6.5: v1@1250.7,823.34 v1(1253.61,823.34) U18H.9@1280.87,823.34 ; U18H.12@1358,823.08 v1(1358,854.34) v1@1358,857.25
NetR99A_1: R99A.1 R101A.2 U18A.5 U19A.16 | length 205.8
  TopLayer w6.5: R101A.2@715.11,4843.28 760.74,4843.28 761.11,4843.65 v1(761.11,4901.65)
  BottomLayer w6.5: U19A.16@700.11,4917.47 745.29,4917.47 v1(761.11,4901.65) 777.72,4918.26 U18A.5@788.31,4918.26
NetR99B_1: R99B.1 R101B.2 U18B.5 U19B.16 | length 205.8
  TopLayer w6.5: R101B.2@714.86,4376.62 760.49,4376.62 760.86,4376.99 v1(760.86,4434.99)
  BottomLayer w6.5: U19B.16@699.86,4450.81 745.04,4450.81 v1(760.86,4434.99) 777.48,4451.6 U18B.5@788.06,4451.6
NetR99C_1: R99C.1 R101C.2 U18C.5 U19C.16 | length 205.8
  TopLayer w6.5: R101C.2@715.31,2898.65 760.94,2898.65 761.31,2899.02 v1(761.31,2957.02)
  BottomLayer w6.5: U19C.16@700.31,2972.84 745.49,2972.84 v1(761.31,2957.02) 777.92,2973.63 U18C.5@788.51,2973.63
NetR99D_1: R99D.1 R101D.2 U18D.5 U19D.16 | length 205.8
  TopLayer w6.5: R101D.2@715.92,3366.62 761.55,3366.62 761.92,3366.99 v1(761.92,3424.99)
  BottomLayer w6.5: U19D.16@700.92,3440.81 746.11,3440.81 v1(761.92,3424.99) 778.54,3441.6 U18D.5@789.12,3441.6
NetR99E_1: R99E.1 R101E.2 U18E.5 U19E.16 | length 205.8
  TopLayer w6.5: R101E.2@1171.61,2110.97 1217.24,2110.97 1217.61,2111.34 v1(1217.61,2169.34)
  BottomLayer w6.5: U19E.16@1156.61,2185.16 1201.8,2185.16 v1(1217.61,2169.34) 1234.23,2185.95 U18E.5@1244.81,2185.95
NetR99F_1: R99F.1 R101F.2 U18F.5 U19F.16 | length 205.8
  TopLayer w6.5: R101F.2@1172,1643.26 1217.63,1643.26 1218,1643.63 v1(1218,1701.63)
  BottomLayer w6.5: U19F.16@1157,1717.45 1202.18,1717.45 v1(1218,1701.63) 1234.61,1718.24 U18F.5@1245.2,1718.24
NetR99G_1: R99G.1 R101G.2 U18G.5 U19G.16 | length 205.8
  TopLayer w6.5: R101G.2@1171.61,164.26 1217.24,164.26 1217.61,164.63 v1(1217.61,222.63)
  BottomLayer w6.5: U19G.16@1156.61,238.45 1201.8,238.45 v1(1217.61,222.63) 1234.23,239.24 U18G.5@1244.81,239.24
NetR99H_1: R99H.1 R101H.2 U18H.5 U19H.16 | length 205.8
  TopLayer w6.5: R101H.2@1171.61,630.97 1217.24,630.97 1217.61,631.34 v1(1217.61,689.34)
  BottomLayer w6.5: U19H.16@1156.61,705.16 1201.8,705.16 v1(1217.61,689.34) 1234.23,705.95 U18H.5@1244.81,705.95
NetR100A_1: R100A.1 R102A.2 U18A.8 U19A.13 | length 209.2
  TopLayer w6.5: R102A.2@713.11,5067.02 759.48,5067.02 R100A.1@760.11,5067.65 758.14,5065.67 v1@758.14,4995.03
  BottomLayer w6.5: U19A.13@700.11,4994.24 757.34,4994.24 758.14,4995.03 U18A.8@788.31,4995.03
  other v1: 757.05,4995.03
NetR100B_1: R100B.1 R102B.2 U18B.8 U19B.13 | length 209.2
  TopLayer w6.5: R102B.2@712.86,4600.36 759.23,4600.36 R100B.1@759.86,4600.99 757.89,4599.01 v1@757.89,4528.37
  BottomLayer w6.5: U19B.13@699.86,4527.58 757.09,4527.58 757.89,4528.37 U18B.8@788.06,4528.37
  other v1: 756.8,4528.37
NetR100C_1: R100C.1 R102C.2 U18C.8 U19C.13 | length 209.2
  TopLayer w6.5: R102C.2@713.31,3122.39 759.68,3122.39 R100C.1@760.31,3123.02 758.34,3121.04 v1@758.34,3050.4
  BottomLayer w6.5: U19C.13@700.31,3049.61 757.54,3049.61 758.34,3050.4 U18C.8@788.51,3050.4
  other v1: 757.25,3050.4
NetR100D_1: R100D.1 R102D.2 U18D.8 U19D.13 | length 209.2
  TopLayer w6.5: R102D.2@713.92,3590.36 760.29,3590.36 R100D.1@760.92,3590.99 758.95,3589.01 v1@758.95,3518.37
  BottomLayer w6.5: U19D.13@700.92,3517.58 758.16,3517.58 758.95,3518.37 U18D.8@789.12,3518.37
  other v1: 757.86,3518.37
NetR100E_1: R100E.1 R102E.2 U18E.8 U19E.13 | length 209.2
  TopLayer w6.5: R102E.2@1169.61,2334.71 1215.98,2334.71 R100E.1@1216.61,2335.34 1214.64,2333.37 v1@1214.64,2262.72
  BottomLayer w6.5: U19E.13@1156.61,2261.93 1213.85,2261.93 1214.64,2262.72 U18E.8@1244.81,2262.72
  other v1: 1213.55,2262.72
NetR100F_1: R100F.1 R102F.2 U18F.8 U19F.13 | length 209.2
  TopLayer w6.5: R102F.2@1170,1867 1216.37,1867 R100F.1@1217,1867.63 1215.03,1865.66 v1@1215.03,1795.02
  BottomLayer w6.5: U19F.13@1157,1794.22 1214.23,1794.22 1215.03,1795.02 U18F.8@1245.2,1795.02
  other v1: 1213.94,1795.02
NetR100G_1: R100G.1 R102G.2 U18G.8 U19G.13 | length 209.2
  TopLayer w6.5: R102G.2@1169.61,388 1215.98,388 R100G.1@1216.61,388.63 1214.64,386.66 v1@1214.64,316.02
  BottomLayer w6.5: U19G.13@1156.61,315.22 1213.85,315.22 1214.64,316.02 U18G.8@1244.81,316.02
  other v1: 1213.55,316.02
NetR100H_1: R100H.1 R102H.2 U18H.8 U19H.13 | length 209.2
  TopLayer w6.5: R102H.2@1169.61,854.71 1215.98,854.71 R100H.1@1216.61,855.34 1214.64,853.37 v1@1214.64,782.72
  BottomLayer w6.5: U19H.13@1156.61,781.93 1213.85,781.93 1214.64,782.72 U18H.8@1244.81,782.72
  other v1: 1213.55,782.72
NetR101A_1: R101A.1 R103A.2 U19A.1 U19A.4 | length 293.9
  TopLayer w6.5: v1(559.66,4877.11) 559.66,4842.47 R103A.2@560.48,4841.65 582.48,4819.65 649.11,4819.65 663.69,4834.23 v1(663.69,4845.85) 700.49,4882.65 R101A.1@715.11,4882.65
  BottomLayer w6.5: v1(559.66,4877.11) U19A.4@586.92,4877.11 ; v1@663.69,4842.94 v1(663.69,4845.85) U19A.1@663.69,4877.11
NetR101B_1: R101B.1 R103B.2 U19B.1 U19B.4 | length 293.9
  TopLayer w6.5: v1(559.41,4410.45) 559.41,4375.81 R103B.2@560.23,4374.99 582.23,4352.99 648.86,4352.99 663.45,4367.57 v1(663.45,4379.19) 700.24,4415.99 R101B.1@714.86,4415.99
  BottomLayer w6.5: v1(559.41,4410.45) U19B.4@586.67,4410.45 ; v1@663.45,4376.28 v1(663.45,4379.19) U19B.1@663.45,4410.45
NetR101C_1: R101C.1 R103C.2 U19C.1 U19C.4 | length 293.9
  TopLayer w6.5: v1(559.86,2932.48) 559.86,2897.84 R103C.2@560.68,2897.02 582.68,2875.02 649.31,2875.02 663.89,2889.6 v1(663.89,2901.22) 700.69,2938.02 R101C.1@715.31,2938.02
  BottomLayer w6.5: v1(559.86,2932.48) U19C.4@587.12,2932.48 ; v1@663.89,2898.31 v1(663.89,2901.22) U19C.1@663.89,2932.48
NetR101D_1: R101D.1 R103D.2 U19D.1 U19D.4 | length 293.9
  TopLayer w6.5: v1(560.48,3400.45) 560.48,3365.81 R103D.2@561.29,3364.99 583.29,3342.99 649.92,3342.99 664.51,3357.57 v1(664.51,3369.19) 701.3,3405.99 R101D.1@715.92,3405.99
  BottomLayer w6.5: v1(560.48,3400.45) U19D.4@587.74,3400.45 ; v1@664.51,3366.28 v1(664.51,3369.19) U19D.1@664.51,3400.45
NetR101E_1: R101E.1 R103E.2 U19E.1 U19E.4 | length 293.9
  TopLayer w6.5: v1(1016.17,2144.8) 1016.17,2110.16 R103E.2@1016.98,2109.34 1038.98,2087.34 1105.61,2087.34 1120.2,2101.92 v1(1120.2,2113.54) 1156.99,2150.34 R101E.1@1171.61,2150.34
  BottomLayer w6.5: v1(1016.17,2144.8) U19E.4@1043.43,2144.8 ; v1@1120.2,2110.63 v1(1120.2,2113.54) U19E.1@1120.2,2144.8
NetR101F_1: R101F.1 R103F.2 U19F.1 U19F.4 | length 293.9
  TopLayer w6.5: v1(1016.55,1677.09) 1016.55,1642.45 R103F.2@1017.37,1641.63 1039.37,1619.63 1106,1619.63 1120.58,1634.21 v1(1120.58,1645.83) 1157.38,1682.63 R101F.1@1172,1682.63
  BottomLayer w6.5: v1(1016.55,1677.09) U19F.4@1043.81,1677.09 ; v1@1120.58,1642.92 v1(1120.58,1645.83) U19F.1@1120.58,1677.09
NetR101G_1: R101G.1 R103G.2 U19G.1 U19G.4 | length 293.9
  TopLayer w6.5: v1(1016.17,198.09) 1016.17,163.45 R103G.2@1016.98,162.63 1038.98,140.63 1105.61,140.63 1120.2,155.21 v1(1120.2,166.83) 1156.99,203.63 R101G.1@1171.61,203.63
  BottomLayer w6.5: v1(1016.17,198.09) U19G.4@1043.43,198.09 ; v1@1120.2,163.92 v1(1120.2,166.83) U19G.1@1120.2,198.09
NetR101H_1: R101H.1 R103H.2 U19H.1 U19H.4 | length 293.9
  TopLayer w6.5: v1(1016.17,664.8) 1016.17,630.16 R103H.2@1016.98,629.34 1038.98,607.34 1105.61,607.34 1120.2,621.92 v1(1120.2,633.54) 1156.99,670.34 R101H.1@1171.61,670.34
  BottomLayer w6.5: v1(1016.17,664.8) U19H.4@1043.43,664.8 ; v1@1120.2,630.63 v1(1120.2,633.54) U19H.1@1120.2,664.8
NetR102A_1: R102A.1 R104A.1 U19A.9 U19A.12 | length 349.1
  TopLayer w6.5: v1(559.31,5034.85) 559.31,5065.21 R104A.1@561.11,5067.02 561.11,5103.65 577.11,5119.65 627.11,5119.65 663.69,5083.06 v1(663.69,5065.85) 663.69,5047.31 683.35,5027.65 R102A.1@713.11,5027.65
  BottomLayer w6.5: v1(559.31,5034.85) 559.57,5034.59 U19A.9@586.92,5034.59 ; U19A.12@663.69,5034.59 v1(663.69,5065.85) v1@663.69,5068.76
NetR102B_1: R102B.1 R104B.1 U19B.9 U19B.12 | length 349.1
  TopLayer w6.5: v1(559.06,4568.19) 559.06,4598.55 R104B.1@560.86,4600.36 560.86,4636.99 576.86,4652.99 626.86,4652.99 663.45,4616.4 v1(663.45,4599.19) 663.45,4580.65 683.11,4560.99 R102B.1@712.86,4560.99
  BottomLayer w6.5: v1(559.06,4568.19) 559.32,4567.93 U19B.9@586.67,4567.93 ; U19B.12@663.45,4567.93 v1(663.45,4599.19) v1@663.45,4602.1
NetR102C_1: R102C.1 R104C.1 U19C.9 U19C.12 | length 349.1
  TopLayer w6.5: v1(559.51,3090.22) 559.51,3120.58 R104C.1@561.31,3122.39 561.31,3159.02 577.31,3175.02 627.31,3175.02 663.89,3138.44 v1(663.89,3121.22) 663.89,3102.68 683.55,3083.02 R102C.1@713.31,3083.02
  BottomLayer w6.5: v1(559.51,3090.22) 559.77,3089.96 U19C.9@587.12,3089.96 ; U19C.12@663.89,3089.96 v1(663.89,3121.22) v1@663.89,3124.13
NetR102D_1: R102D.1 R104D.1 U19D.9 U19D.12 | length 349.1
  TopLayer w6.5: v1(560.12,3558.19) 560.12,3588.55 R104D.1@561.92,3590.36 561.92,3626.99 577.92,3642.99 627.92,3642.99 664.51,3606.4 v1(664.51,3589.19) 664.51,3570.65 684.17,3550.99 R102D.1@713.92,3550.99
  BottomLayer w6.5: v1(560.12,3558.19) 560.38,3557.93 U19D.9@587.74,3557.93 ; U19D.12@664.51,3557.93 v1(664.51,3589.19) v1@664.51,3592.1
NetR102E_1: R102E.1 R104E.1 U19E.9 U19E.12 | length 349.1
  TopLayer w6.5: v1(1015.81,2302.54) 1015.81,2332.91 R104E.1@1017.61,2334.71 1017.61,2371.34 1033.61,2387.34 1083.61,2387.34 1120.2,2350.76 v1(1120.2,2333.54) 1120.2,2315 1139.86,2295.34 R102E.1@1169.61,2295.34
  BottomLayer w6.5: v1(1015.81,2302.54) 1016.07,2302.28 U19E.9@1043.43,2302.28 ; U19E.12@1120.2,2302.28 v1(1120.2,2333.54) v1@1120.2,2336.45
NetR102F_1: R102F.1 R104F.1 U19F.9 U19F.12 | length 349.1
  TopLayer w6.5: v1(1016.2,1834.83) 1016.2,1865.2 R104F.1@1018,1867 1018,1903.63 1034,1919.63 1084,1919.63 1120.58,1883.05 v1(1120.58,1865.83) 1120.58,1847.29 1140.24,1827.63 R102F.1@1170,1827.63
  BottomLayer w6.5: v1(1016.2,1834.83) 1016.46,1834.57 U19F.9@1043.81,1834.57 ; U19F.12@1120.58,1834.57 v1(1120.58,1865.83) v1@1120.58,1868.74
NetR102G_1: R102G.1 R104G.1 U19G.9 U19G.12 | length 349.1
  TopLayer w6.5: v1(1015.81,355.83) 1015.81,386.2 R104G.1@1017.61,388 1017.61,424.63 1033.61,440.63 1083.61,440.63 1120.2,404.05 v1(1120.2,386.83) 1120.2,368.29 1139.86,348.63 R102G.1@1169.61,348.63
  BottomLayer w6.5: v1(1015.81,355.83) 1016.07,355.57 U19G.9@1043.43,355.57 ; U19G.12@1120.2,355.57 v1(1120.2,386.83) v1@1120.2,389.74
NetR102H_1: R102H.1 R104H.1 U19H.9 U19H.12 | length 349.1
  TopLayer w6.5: v1(1015.81,822.54) 1015.81,852.91 R104H.1@1017.61,854.71 1017.61,891.34 1033.61,907.34 1083.61,907.34 1120.2,870.76 v1(1120.2,853.54) 1120.2,835 1139.86,815.34 R102H.1@1169.61,815.34
  BottomLayer w6.5: v1(1015.81,822.54) 1016.07,822.28 U19H.9@1043.43,822.28 ; U19H.12@1120.2,822.28 v1(1120.2,853.54) v1@1120.2,856.45
NetRT1A_1: RT1A.1 U17A.12 | length 138
  BottomLayer w6.5: RT1A.1@1832.61,4638.98 1862.35,4638.98 1912.15,4688.78 U17A.12@1950,4688.78
NetRT1A_2: RT1A.2 U17A.11 | length 140.1
  BottomLayer w6.5: RT1A.2@1832.61,4614.37 1863.4,4614.37 1918.13,4669.09 U17A.11@1950,4669.09
NetRT1A_3: RT1A.3 U17A.9 | length 131.9
  BottomLayer w6.5: RT1A.3@1832.61,4594.69 1872.7,4594.69 1907.74,4629.72 U17A.9@1950,4629.72
NetRT1A_4: RT1A.4 U17A.8 | length 131.9
  BottomLayer w6.5: RT1A.4@1832.61,4575 1880,4575 1915.04,4610.04 U17A.8@1950,4610.04
NetRT1A_5: RT1A.5 U17A.6 | length 123.7
  BottomLayer w6.5: RT1A.5@1832.61,4555.32 1890.21,4555.32 1905.56,4570.67 U17A.6@1950,4570.67
NetRT1A_6: RT1A.6 U17A.5 | length 123.7
  BottomLayer w6.5: RT1A.6@1832.61,4535.63 1895.63,4535.63 1910.98,4550.98 U17A.5@1950,4550.98
NetRT1A_7: RT1A.7 U17A.3 | length 119.2
  BottomLayer w6.5: RT1A.7@1832.61,4515.95 1885.27,4515.95 1889.6,4511.61 U17A.3@1950,4511.61
NetRT1A_8: RT1A.8 U17A.2 | length 117.6
  BottomLayer w6.5: RT1A.8@1832.61,4491.34 1949.41,4491.34 U17A.2@1950,4491.93
NetRT1B_1: RT1B.1 U17B.12 | length 138
  BottomLayer w6.5: RT1B.1@1833.43,3162.32 1863.16,3162.32 1912.97,3212.12 U17B.12@1950.81,3212.12
NetRT1B_2: RT1B.2 U17B.11 | length 140.1
  BottomLayer w6.5: RT1B.2@1833.43,3137.71 1864.22,3137.71 1918.94,3192.43 U17B.11@1950.81,3192.43
NetRT1B_3: RT1B.3 U17B.9 | length 131.9
  BottomLayer w6.5: RT1B.3@1833.43,3118.02 1873.51,3118.02 1908.55,3153.06 U17B.9@1950.81,3153.06
NetRT1B_4: RT1B.4 U17B.8 | length 131.9
  BottomLayer w6.5: RT1B.4@1833.43,3098.34 1880.81,3098.34 1915.85,3133.38 U17B.8@1950.81,3133.38
NetRT1B_5: RT1B.5 U17B.6 | length 123.7
  BottomLayer w6.5: RT1B.5@1833.43,3078.65 1891.02,3078.65 1906.37,3094.01 U17B.6@1950.81,3094.01
NetRT1B_6: RT1B.6 U17B.5 | length 123.7
  BottomLayer w6.5: RT1B.6@1833.43,3058.97 1896.44,3058.97 1911.8,3074.32 U17B.5@1950.81,3074.32
NetRT1B_7: RT1B.7 U17B.3 | length 119.2
  BottomLayer w6.5: RT1B.7@1833.43,3039.28 1886.08,3039.28 1890.41,3034.95 U17B.3@1950.81,3034.95
NetRT1B_8: RT1B.8 U17B.2 | length 116.8
  BottomLayer w6.5: RT1B.8@1833.43,3014.68 U17B.2@1950.23,3014.68
NetRT1C_1: RT1C.1 U17C.12 | length 138
  BottomLayer w6.5: RT1C.1@2289.12,1906.67 2318.85,1906.67 2368.66,1956.47 U17C.12@2406.5,1956.47
NetRT1C_2: RT1C.2 U17C.11 | length 140.1
  BottomLayer w6.5: RT1C.2@2289.12,1882.06 2319.91,1882.06 2374.63,1936.79 U17C.11@2406.5,1936.79
NetRT1C_3: RT1C.3 U17C.9 | length 131.9
  BottomLayer w6.5: RT1C.3@2289.12,1862.38 2329.2,1862.38 2364.24,1897.42 U17C.9@2406.5,1897.42
NetRT1C_4: RT1C.4 U17C.8 | length 131.9
  BottomLayer w6.5: RT1C.4@2289.12,1842.69 2336.5,1842.69 2371.54,1877.73 U17C.8@2406.5,1877.73
NetRT1C_5: RT1C.5 U17C.6 | length 123.7
  BottomLayer w6.5: RT1C.5@2289.12,1823.01 2346.71,1823.01 2362.06,1838.36 U17C.6@2406.5,1838.36
NetRT1C_6: RT1C.6 U17C.5 | length 123.7
  BottomLayer w6.5: RT1C.6@2289.12,1803.32 2352.13,1803.32 2367.49,1818.68 U17C.5@2406.5,1818.68
NetRT1C_7: RT1C.7 U17C.3 | length 119.2
  BottomLayer w6.5: RT1C.7@2289.12,1783.64 2341.77,1783.64 2346.1,1779.31 U17C.3@2406.5,1779.31
NetRT1C_8: RT1C.8 U17C.2 | length 116.8
  BottomLayer w6.5: RT1C.8@2289.12,1759.03 U17C.2@2405.92,1759.03
NetRT1D_1: RT1D.1 U17D.12 | length 138
  BottomLayer w6.5: RT1D.1@2289.12,426.67 2318.85,426.67 2368.66,476.47 U17D.12@2406.5,476.47
NetRT1D_2: RT1D.2 U17D.11 | length 140.1
  BottomLayer w6.5: RT1D.2@2289.12,402.06 2319.91,402.06 2374.63,456.79 U17D.11@2406.5,456.79
NetRT1D_3: RT1D.3 U17D.9 | length 131.9
  BottomLayer w6.5: RT1D.3@2289.12,382.38 2329.2,382.38 2364.24,417.42 U17D.9@2406.5,417.42
NetRT1D_4: RT1D.4 U17D.8 | length 131.9
  BottomLayer w6.5: RT1D.4@2289.12,362.69 2336.5,362.69 2371.54,397.73 U17D.8@2406.5,397.73
NetRT1D_5: RT1D.5 U17D.6 | length 123.7
  BottomLayer w6.5: RT1D.5@2289.12,343.01 2346.71,343.01 2362.06,358.36 U17D.6@2406.5,358.36
NetRT1D_6: RT1D.6 U17D.5 | length 123.7
  BottomLayer w6.5: RT1D.6@2289.12,323.32 2352.13,323.32 2367.49,338.68 U17D.5@2406.5,338.68
NetRT1D_7: RT1D.7 U17D.3 | length 119.2
  BottomLayer w6.5: RT1D.7@2289.12,303.64 2341.77,303.64 2346.1,299.31 U17D.3@2406.5,299.31
NetRT1D_8: RT1D.8 U17D.2 | length 116.8
  BottomLayer w6.5: RT1D.8@2289.12,279.03 U17D.2@2405.92,279.03
NetRT2A_1: RT2A.1 U17A.23 | length 414
  BottomLayer w6.5: RT2A.1@1754.06,5098.66 1787.44,5098.66 1917.45,4968.65 1981.35,4968.65 2015,4935 2015,4921.45 1998.87,4905.31 U17A.23@1950,4905.31
NetRT2A_2: RT2A.2 U17A.22 | length 314.8
  BottomLayer w6.5: RT2A.2@1754.06,5074.05 1790.63,5074.05 1900,4964.69 1900,4895 1900.39,4895 1909.76,4885.63 U17A.22@1950,4885.63
NetRT2A_3: RT2A.3 U17A.20 | length 335.8
  BottomLayer w6.5: RT2A.3@1754.06,5054.37 1789.1,5054.37 1884.38,4959.1 1884.38,4869.29 1908.66,4845 1948.74,4845 U17A.20@1950,4846.26
NetRT2A_4: RT2A.4 U17A.19 | length 339.1
  BottomLayer w6.5: RT2A.4@1754.06,5034.68 1787.58,5034.68 1869.38,4952.88 1869.38,4855.62 1898.43,4826.57 U17A.19@1950,4826.57
NetRT2A_5: RT2A.5 U17A.17 | length 355.2
  BottomLayer w6.5: RT2A.5@1754.06,5015 1786.05,5015 1854.38,4946.67 1854.38,4835.95 1903.13,4787.2 U17A.17@1950,4787.2
NetRT2A_6: RT2A.6 U17A.16 | length 359.9
  BottomLayer w6.5: RT2A.6@1754.06,4995.31 1784.52,4995.31 1839.38,4940.46 1839.38,4821.62 1893.48,4767.52 U17A.16@1950,4767.52
NetRT2A_7: RT2A.7 U17A.14 | length 369.3
  BottomLayer w6.5: RT2A.7@1754.06,4975.63 1779.37,4975.63 1824.38,4930.62 1824.38,4809.61 1905.83,4728.15 U17A.14@1950,4728.15
NetRT2A_8: RT2A.8 U17A.13 | length 365.4
  BottomLayer w6.5: RT2A.8@1754.06,4951.02 1773.98,4951.02 1809.38,4915.62 1809.38,4796.14 1895.83,4709.69 U17A.13@1949.5,4709.69
NetRT2B_1: RT2B.1 U17B.23 | length 414
  BottomLayer w6.5: RT2B.1@1754.87,3622 1788.25,3622 1918.27,3491.99 1982.17,3491.99 2015.81,3458.34 2015.81,3444.79 1999.68,3428.65 U17B.23@1950.81,3428.65
NetRT2B_2: RT2B.2 U17B.22 | length 314.8
  BottomLayer w6.5: RT2B.2@1754.87,3597.39 1791.45,3597.39 1900.81,3488.03 1900.81,3418.34 1901.21,3418.34 1910.58,3408.97 U17B.22@1950.81,3408.97
NetRT2B_3: RT2B.3 U17B.20 | length 337.6
  BottomLayer w6.5: RT2B.3@1754.87,3577.71 1789.92,3577.71 1885.19,3482.44 1885.19,3392.62 1909.48,3368.34 U17B.20@1949.55,3368.34 ; U17B.20@1949.55,3368.34 U17B.20@1950.81,3369.6 U17B.20@1949.55,3368.34
NetRT2B_4: RT2B.4 U17B.19 | length 339.1
  BottomLayer w6.5: RT2B.4@1754.87,3558.02 1788.39,3558.02 1870.19,3476.22 1870.19,3378.96 1899.24,3349.91 U17B.19@1950.81,3349.91
NetRT2B_5: RT2B.5 U17B.17 | length 355.2
  BottomLayer w6.5: RT2B.5@1754.87,3538.34 1786.86,3538.34 1855.19,3470.01 1855.19,3359.29 1903.94,3310.54 U17B.17@1950.81,3310.54
NetRT2B_6: RT2B.6 U17B.16 | length 359.9
  BottomLayer w6.5: RT2B.6@1754.87,3518.65 1785.34,3518.65 1840.19,3463.8 1840.19,3344.96 1894.3,3290.86 U17B.16@1950.81,3290.86
NetRT2B_7: RT2B.7 U17B.14 | length 369.3
  BottomLayer w6.5: RT2B.7@1754.87,3498.97 1780.18,3498.97 1825.19,3453.96 1825.19,3332.94 1906.65,3251.49 U17B.14@1950.81,3251.49
NetRT2B_8: RT2B.8 U17B.13 | length 365.4
  BottomLayer w6.5: RT2B.8@1754.87,3474.36 1774.79,3474.36 1810.19,3438.96 1810.19,3319.48 1896.65,3233.02 U17B.13@1950.32,3233.02
NetRT2C_1: RT2C.1 U17C.23 | length 414
  BottomLayer w6.5: RT2C.1@2210.56,2366.35 2243.94,2366.35 2373.96,2236.34 2437.86,2236.34 2471.5,2202.69 2471.5,2189.14 2455.37,2173.01 U17C.23@2406.5,2173.01
NetRT2C_2: RT2C.2 U17C.22 | length 314.8
  BottomLayer w6.5: RT2C.2@2210.56,2341.74 2247.14,2341.74 2356.5,2232.38 2356.5,2162.69 2356.9,2162.69 2366.27,2153.32 U17C.22@2406.5,2153.32
NetRT2C_3: RT2C.3 U17C.20 | length 335.8
  BottomLayer w6.5: RT2C.3@2210.56,2322.06 2245.61,2322.06 2340.88,2226.79 2340.88,2136.98 2365.17,2112.69 2405.24,2112.69 U17C.20@2406.5,2113.95
NetRT2C_4: RT2C.4 U17C.19 | length 339.1
  BottomLayer w6.5: RT2C.4@2210.56,2302.37 2244.08,2302.37 2325.88,2220.57 2325.88,2123.31 2354.93,2094.27 U17C.19@2406.5,2094.27
NetRT2C_5: RT2C.5 U17C.17 | length 355.2
  BottomLayer w6.5: RT2C.5@2210.56,2282.69 2242.55,2282.69 2310.88,2214.36 2310.88,2103.65 2359.63,2054.9 U17C.17@2406.5,2054.9
NetRT2C_6: RT2C.6 U17C.16 | length 359.9
  BottomLayer w6.5: RT2C.6@2210.56,2263 2241.03,2263 2295.88,2208.15 2295.88,2089.31 2349.99,2035.21 U17C.16@2406.5,2035.21
NetRT2C_7: RT2C.7 U17C.14 | length 369.3
  BottomLayer w6.5: RT2C.7@2210.56,2243.32 2235.87,2243.32 2280.88,2198.31 2280.88,2077.3 2362.34,1995.84 U17C.14@2406.5,1995.84
NetRT2C_8: RT2C.8 U17C.13 | length 365.4
  BottomLayer w6.5: RT2C.8@2210.56,2218.71 2230.48,2218.71 2265.88,2183.31 2265.88,2063.83 2352.34,1977.38 U17C.13@2406.01,1977.38
NetRT2D_1: RT2D.1 U17D.23 | length 414
  BottomLayer w6.5: RT2D.1@2210.56,886.35 2243.94,886.35 2373.96,756.34 2437.86,756.34 2471.5,722.69 2471.5,709.14 2455.37,693.01 U17D.23@2406.5,693.01
NetRT2D_2: RT2D.2 U17D.22 | length 314.8
  BottomLayer w6.5: RT2D.2@2210.56,861.74 2247.14,861.74 2356.5,752.38 2356.5,682.69 2356.9,682.69 2366.27,673.32 U17D.22@2406.5,673.32
NetRT2D_3: RT2D.3 U17D.20 | length 335.8
  BottomLayer w6.5: RT2D.3@2210.56,842.06 2245.61,842.06 2340.88,746.79 2340.88,656.98 2365.17,632.69 2405.24,632.69 U17D.20@2406.5,633.95
NetRT2D_4: RT2D.4 U17D.19 | length 339.1
  BottomLayer w6.5: RT2D.4@2210.56,822.37 2244.08,822.37 2325.88,740.57 2325.88,643.31 2354.93,614.27 U17D.19@2406.5,614.27
NetRT2D_5: RT2D.5 U17D.17 | length 355.2
  BottomLayer w6.5: RT2D.5@2210.56,802.69 2242.55,802.69 2310.88,734.36 2310.88,623.65 2359.63,574.9 U17D.17@2406.5,574.9
NetRT2D_6: RT2D.6 U17D.16 | length 359.9
  BottomLayer w6.5: RT2D.6@2210.56,783 2241.03,783 2295.88,728.15 2295.88,609.31 2349.99,555.21 U17D.16@2406.5,555.21
NetRT2D_7: RT2D.7 U17D.14 | length 369.3
  BottomLayer w6.5: RT2D.7@2210.56,763.32 2235.87,763.32 2280.88,718.31 2280.88,597.3 2362.34,515.84 U17D.14@2406.5,515.84
NetRT2D_8: RT2D.8 U17D.13 | length 365.4
  BottomLayer w6.5: RT2D.8@2210.56,738.71 2230.48,738.71 2265.88,703.31 2265.88,583.83 2352.34,497.38 U17D.13@2406.01,497.38
NetTMON2A_1: TMON2A.1 U12A.5 | length 119.9
  TopLayer w6.5: TMON2A.1@3361.99,3232.01 3365.25,3228.75 U12A.5@3365.25,3113.48
  other v1: 3365.25,3162.64
NetTMON2B_1: TMON2B.1 U12B.5 | length 123.2
  TopLayer w6.5: TMON2B.1@3361.99,1679.63 3365.25,1676.37 v1(3365.25,1611.26) U12B.5@3365.25,1557.74
NULDACCLKA_N: R44A.2 U9A.2 | length 89.4
  TopLayer w4.5: U9A.2@1956.01,5037.6 v1(1956.01,5094.66)
  BottomLayer w4.5: R44A.2@1950.37,5064.66 1950.37,5089.02 v1(1956.01,5094.66)
NULDACCLKA_P: R44A.1 U9A.1 | length 89.1
  TopLayer w4.5: U9A.1@1906.01,5037.6 v1(1906,5094.66)
  BottomLayer w4.5: v1(1906,5094.66) 1911,5089.66 R44A.1@1911,5064.66
NULDACCLKB_N: R44B.2 U9B.2 | length 89.4
  TopLayer w4.5: U9B.2@1954.71,3559.89 v1(1954.71,3616.95)
  BottomLayer w4.5: R44B.2@1949.07,3586.95 1949.07,3611.32 v1(1954.71,3616.95)
NULDACCLKB_P: R44B.1 U9B.1 | length 89.1
  TopLayer w4.5: U9B.1@1904.71,3559.89 v1(1904.7,3616.95)
  BottomLayer w4.5: v1(1904.7,3616.95) 1909.7,3611.95 R44B.1@1909.7,3586.95
NULDACCLKC_N: R44C.2 U9C.2 | length 89.4
  TopLayer w4.5: U9C.2@2410.4,2304.24 v1(2410.4,2361.31)
  BottomLayer w4.5: R44C.2@2404.76,2331.31 2404.76,2355.67 v1(2410.4,2361.31)
NULDACCLKC_P: R44C.1 U9C.1 | length 89.1
  TopLayer w4.5: U9C.1@2360.39,2304.25 v1(2360.39,2361.31)
  BottomLayer w4.5: v1(2360.39,2361.31) 2365.39,2356.31 R44C.1@2365.39,2331.31
NULDACCLKD_N: R44D.2 U9D.2 | length 89.4
  TopLayer w4.5: U9D.2@2410.4,824.24 v1(2410.4,881.31)
  BottomLayer w4.5: R44D.2@2404.76,851.31 2404.76,875.67 v1(2410.4,881.31)
NULDACCLKD_P: R44D.1 U9D.1 | length 89.1
  TopLayer w4.5: U9D.1@2360.39,824.25 v1(2360.39,881.31)
  BottomLayer w4.5: v1(2360.39,881.31) 2365.39,876.31 R44D.1@2365.39,851.31